# Altium PCB LIS2DH12R_Adapter.PcbDoc
Units mil, origin at the board's own origin, x right, y up, seen from the top; angles counter-clockwise.
Board outline 280 x 390 mil, 2 copper layers (Top Layer, Bottom Layer); 3 components, 6 nets, 22 pads, 3 vias.
Unrouted connection lines stored in the file: 12.
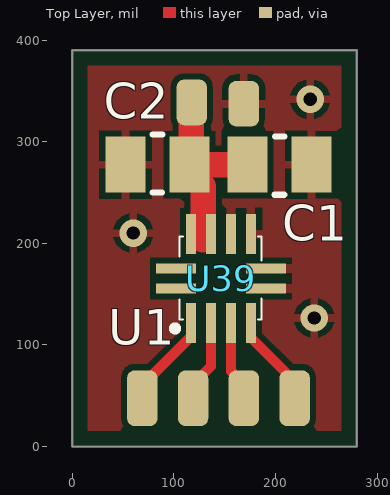
[diagram p0: Top Layer view]
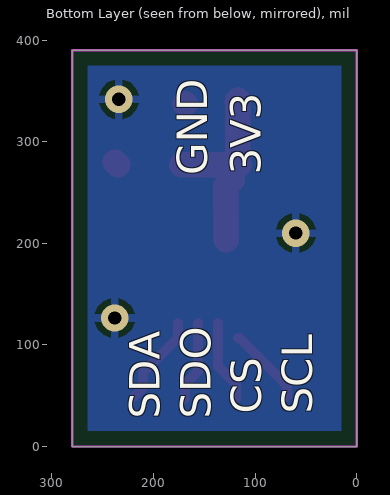
[diagram p1: Bottom Layer view, seen from below]
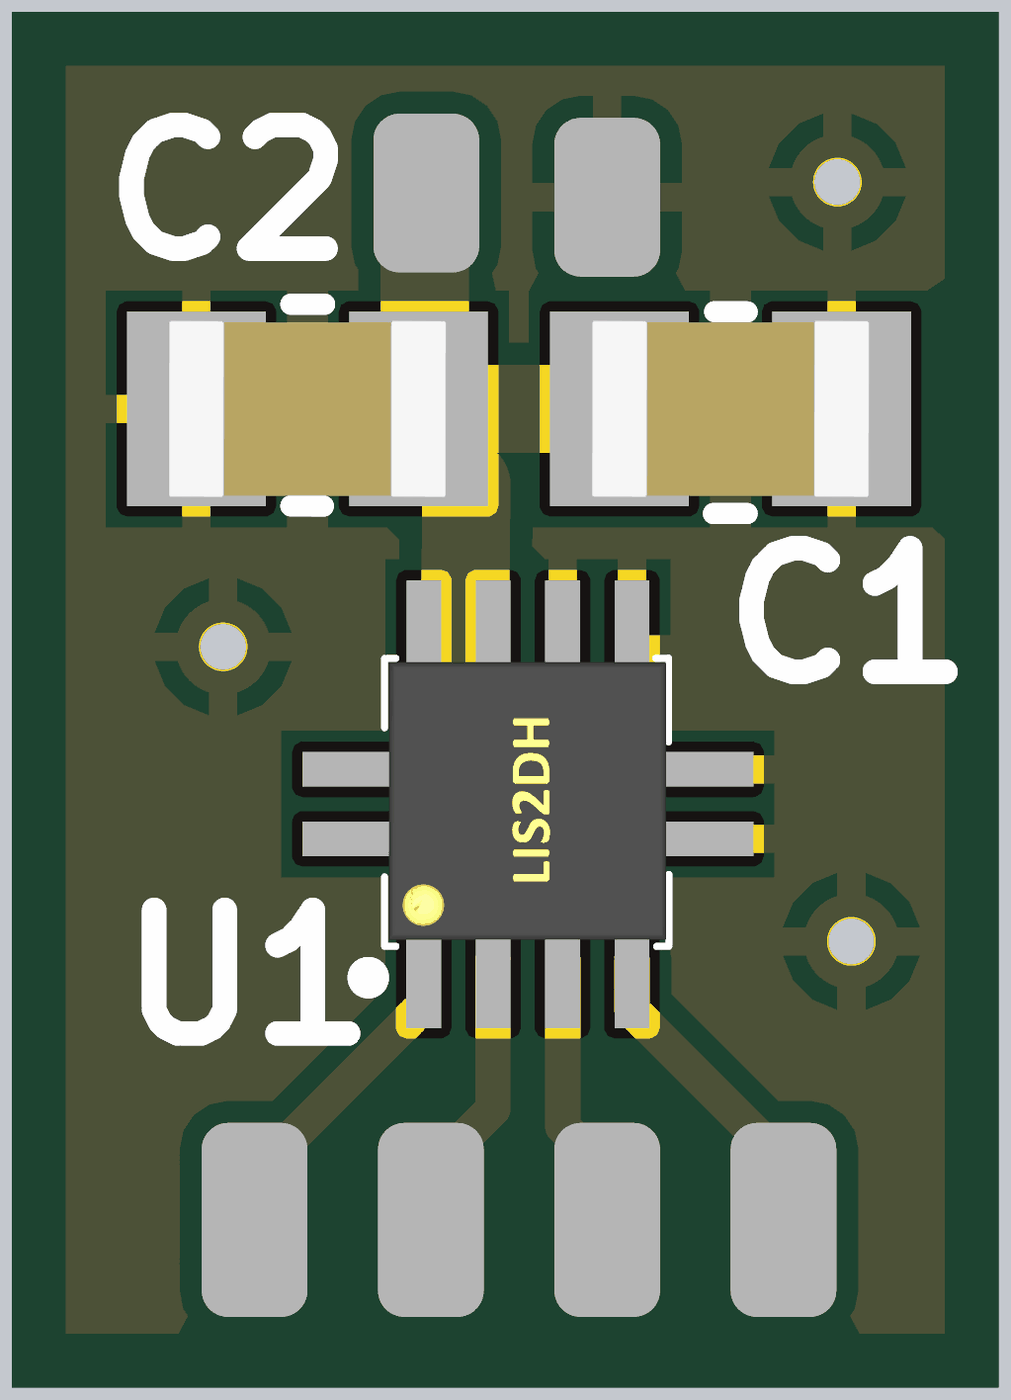
[diagram p2: 3D render of the assembled board from above, using the file's embedded part models]

## Layer stack, top to bottom
Top Solder: solder mask 0.4, Solder Resist, Dk 3.5
Top Layer: signal copper 1.4
Dielectric 1: dielectric 12.6, FR-4, Dk 4.8
Bottom Layer: signal copper 1.4
Bottom Solder: solder mask 0.4, Solder Resist, Dk 3.5

## Board outline
0,0 280,0 280,390 0,390

## Design rules (kind name [scope] priority, off if disabled: settings)
BoardOutlineClearance [All] p1: gap=15 ignorepadtopadclearanceinfootprint=FALSE
Clearance [All] p1: gap=6 ignorepadtopadclearanceinfootprint=FALSE except(0: Arc-Hole Track-Hole SMDPad-Hole THPad-Hole Via-Hole Fill-Hole Poly-Hole Region-Hole Text-Hole)
ComponentClearance [All] p1: gap=1 collisioncheckmode=3 verticalgap=1 showdistances=FALSE
DiffPairsRouting [All] p1: maxlimit=393.7 minlimit=6 mostfreqgap=8 toplayer_minwidth=6 toplayer_maxwidth=15 toplayer_prefwidth=8 bottomlayer_minwidth=6 bottomlayer_maxwidth=15 bottomlayer_prefwidth=8 maxuncoupledlength=500
HoleSize [All] p1: absolutevalues=TRUE maxlimit=265 minlimit=13 maxpercent=80.000 minpercent=20.000
HoleToHoleClearance [All] p1: gap=10 allowstackedmicrovias=FALSE
MinimumAnnularRing [All] p1: minimumring=7
MinimumSolderMaskSliver [All] p1: minsoldermaskwidth=0
PlaneClearance [All] p1: clearance=10
PlaneConnect [All] p1: planeconnectstyle=Direct reliefexpansion=16 reliefentries=4 reliefconductorwidth=6 reliefairgap=6
PolygonConnect [All] p1: connectstyle=Relief reliefconductorwidth=8 reliefentries=4 polygonreliefangle="90 Angle" airgapwidth=6
RoutingCorners [All] p1: cornerstyle=45-Degree minsetback=49.21 maxsetback=49.21
RoutingVias [All] p1: holewidth=15 width=30 viastyle="Through Hole" minholewidth=13 minwidth=27 maxholewidth=100 maxwidth=114
SilkToSilkClearance [All] p1: silktosilkclearance=0
SilkToSolderMaskClearance [IsPad] p1: minsilkscreentomaskgap=6 clearancetoexposedcopper=TRUE
SolderMaskExpansion [All] p1: expansion=2.95 istentingtop=FALSE
Width [All] p1: maxlimit=400 minlimit=6 preferedwidth=8
20 further rules are at their usual default settings.

## Components (designator, comment, footprint, x,y, rotation, side; value= is the part's Value field where it differs from the comment)
C1 "Cap" C0805 203.91,277.46 r0 top value=10uF (schematic designator C46)
C2 "Cap" C0805 83.91,277.46 r180 top value=0.1uF (schematic designator C47)
U39 "" LGA-12 136.58,135.89 r90 top

## Footprints (in the part's own frame and the unit in brackets; to place one, negate y for a bottom-side part, rotate by r counter-clockwise, add the part's x,y. Pads: shape width x height; smd on the part's side, far side on the other; paste and mask are expansions set on the pad)
C0805 [mm]
  rect 1x1.4 smd: 1(-0.8,0) 2(0.8,0)
  silkscreen extent -0.12,-0.75 0.12,0.7, body extent -1,-0.64 1,0.64, height 1.27
LGA-12 [mm]
  rect 1x0.25 smd: 1(-0.363,0.5) 2(-0.363,0.001) 3(-0.363,-0.5) 4(-0.363,-1) 7(1.862,-1) 8(1.862,-0.5) 9(1.862,0) 10(1.862,0.5)
  rect 0.25x1 smd: 5(0.5,-1.375) 6(1,-1.375) 11(1,0.875) 12(0.5,0.875)
  silkscreen extent -0.55,-1.27 1.8,0.95, body extent -0.23,-1.25 1.77,0.75, height 1

## Part data
C1: "Multilayer Ceramic Capacitors MLCC - SMD/SMT CGA 0805 6.3V 10uF X7R 10% AEC-Q200", Case/Package=0805, MFR=TDK, MFR P/N=CGA4J1X7R0J106K125AC, Voltage="6.3 V", ComponentLink1Description=Datasheet, ComponentLink1URL=https://product.tdk.com/info/en/catalog/datasheets/mlcc_automotive_general_en.pdf?ref_disty=mouser, Mounting Technology=SMT, PACKAGE=0805, PackageReference=0805
C2: "Capacitor Ceramic X7R 50V 0.1uF 0805 SMT", Case/Package=0805, MFR=KEMET, MFR P/N=C0805C104K4RACTU, ComponentLink1Description=Datasheet, Detex P/N=101727‐7, Mounting Technology=SMT, PACKAGE=0805, PackageReference=0805

## Free pads (board coordinates)
  rrect50% 30x55 smd mask+0: SCL(68.91,47.54) SCL(118.91,47.54) SCL(168.91,47.54) SCL(218.91,47.54)
  rrect50% 30x45 smd mask+0: SCL(117.59,338.65) SCL(168.91,337.46)

## Via types
v1: diameter 27, hole 13, Top Layer to Bottom Layer, tented both sides, 3 vias

## Nets (pads, with @x,y where several pads share a name; then routed paths per layer and width w, separated by ;. In a path a pad name is that pad's centre, name@x,y a point inside that pad or via, vN(x,y) a via of type N, cw(c..) or ccw(c..) an arc to the next point about the centre after c; other vN are vias at no path point)
3V3: C1.1 C2.1 pad.SCL@117.59,338.65 U39.9 U39.10 | length 203
  Top Layer w25: pad.SCL@117.59,338.65 117.16,340.71 117.16,279.22 C2.1 ; 128.47,203.21 129,255.99 122.59,262.41 122.59,270.28 C2.1 ; C1.1 C2.1
CS: pad.SCL@118.91,47.54 U39.2 | length 81.4
  Top Layer w10: pad.SCL@118.91,47.54 118.91,61.39 136.48,78.96 136.48,121.54 U39.2
GND: C1.2 C2.2 pad.SCL@168.91,337.46 U39.5 U39.6 U39.7 U39.8 | length 3.4
  Top Layer w25: pad.SCL@168.91,337.46 pad.SCL@169.05,337.61 ; C1.2 C1.2@237.66,279.72
  other v1: 238.18,126.5 60,210 234.19,341.76
SCLK: pad.SCL@68.91,47.54 U39.1 | length 78.3
  Top Layer w10: pad.SCL@68.91,49.22 68.91,60.37 115.48,106.94 U39.1@116.79,106.94
SDA: pad.SCL@218.91,47.54 U39.4 | length 90.2
  Top Layer w10: U39.4 175.93,107.01 210.45,72.49 210.45,57.69 pad.SCL@218.91,49.23
SDO: pad.SCL@168.91,47.54 U39.3 | length 79.3
  Top Layer w10: U39.3 156.32,121.54 156.32,73.98 168.91,61.39 pad.SCL@168.91,47.54
pads on no net: U39.11 U39.12

## Polygon pours and split planes (outlines as drawn)
GND on Top Layer "GND_L01_P000" (solid, remove dead copper, pour order 0): -40,520 -40,-45 310,-45 310,530
GND on Bottom Layer "GND_L02_P001" (solid, remove dead copper, pour order 1): -39.25,518.66 -39.25,-46.34 310.75,-46.34 310.75,528.66

## Keep-outs
Keep-Out Layer:
  the board outline again, w2

## Silkscreen, mask and mechanical layers (free items; w line width, h text height)
Bottom Overlay:
  text "3V3" at 94.48,267.25 h30 r270
  text "GND" at 147.09,266.8 h30 r270
  text "SCL" at 43.91,32.46 h30 r270
  text "CS" at 93.91,32.46 h30 r270
  text "SDO" at 143.91,27.46 h30 r270
  text "SDA" at 193.91,27.46 h30 r270

## Text inside footprints (layer, text, board x,y; h text height)
U39: Top Overlay "U1" at 35.58,99.97 h35